# Altium PCB NS6202_V1.0.PcbDoc
Units mm, origin at the board's own origin, x right, y up, seen from the top; angles counter-clockwise.
Board outline 60 x 80 mm, 2 copper layers (Top, Bottom), stack 0.323 mm thick; 103 components, 109 nets, 414 pads, 207 vias.
Unrouted connection lines stored in the file: 1.
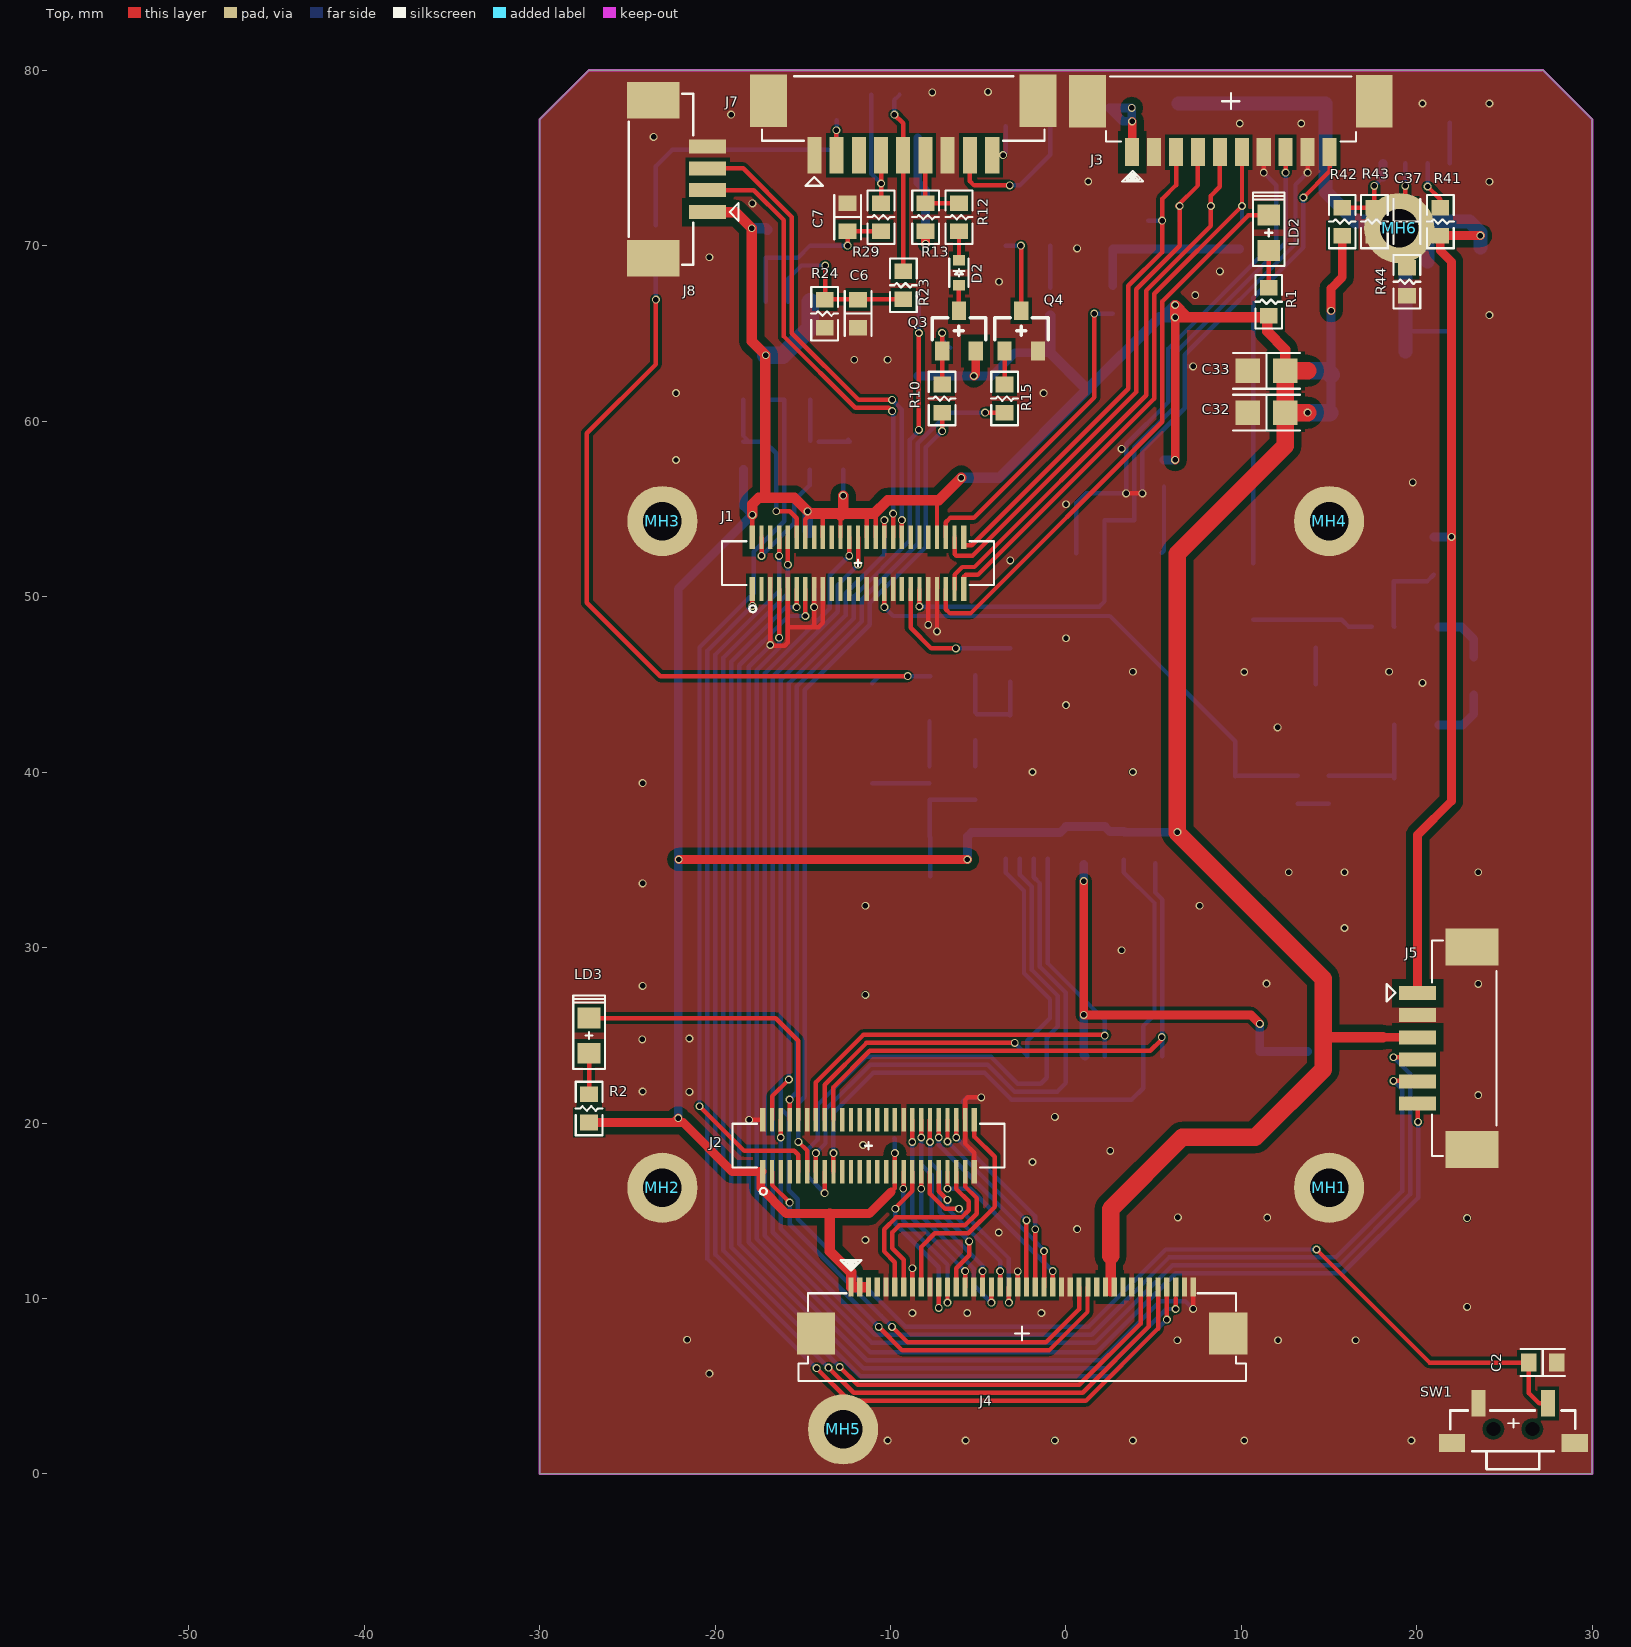
[diagram p0: Top view]
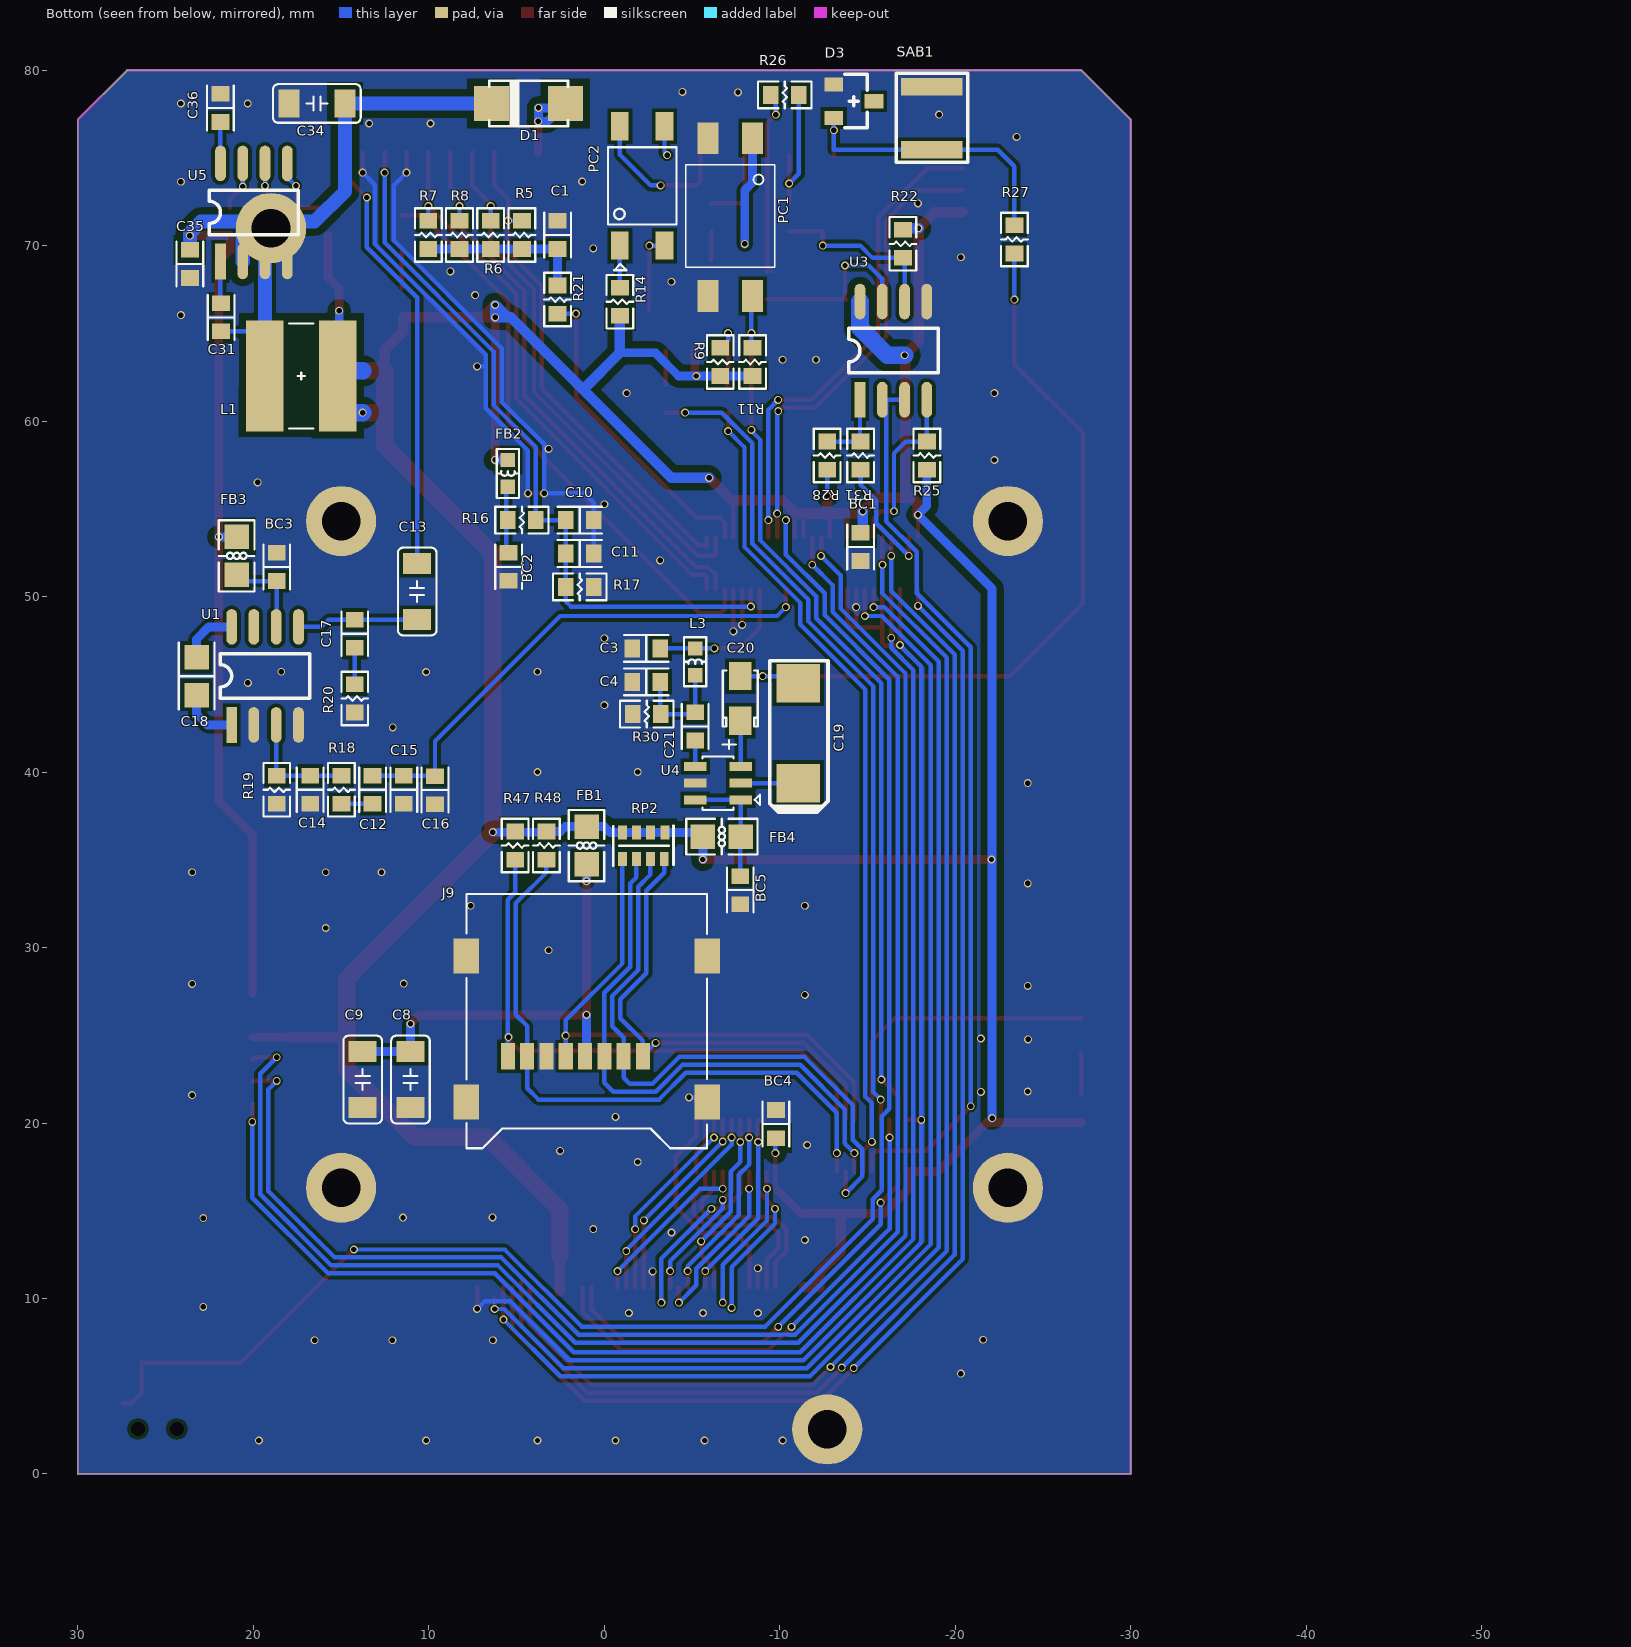
[diagram p1: Bottom view, seen from below]

## Layer stack, top to bottom
Solder Mask Top: solder mask 0.0102, Solder Resist, Dk 3.5
Top: signal copper 0.0343
Dielectric 1: core 0.254, FR-4, Dk 4.2
Bottom: signal copper 0.0343
Solder Mask Bottom: solder mask 0.0102, Solder Resist, Dk 3.5

## Board outline
-30,0 30,0 30,77.188 27.188,80 -27.188,80 -30,77.188

## Design rules (kind name [scope] priority, off if disabled: settings)
Clearance Clearance_4 [OnLayer('Keep-Out Layer') vs InNet('GND')] p1: gap=0.001
Clearance Clearance_3 [IsRegion vs (InNet('+12V') OR InNet('+12V_POE') OR InNet('+3.3V')OR InNet('+1.8V') or Innet('+5.0V')or Innet('N17301853'))] p2: gap=0.4
Clearance Clearance_2 [(InComponent('U1') OR InComponent('U4') OR InComponent('J2') OR InComponent('J7') OR InComponent('J8'))] p3: gap=0.2
Clearance Clearance_1 [IsVia] p4: gap=0.01
Clearance [All] p5: gap=0.2
ComponentClearance ComponentClearance_1 [InComponent('J6')] p1: gap=0 collisioncheckmode=3 verticalgap=0 showdistances=FALSE
ComponentClearance [All] p2: gap=0.01 collisioncheckmode=3 verticalgap=0.254 showdistances=FALSE
HoleSize [All] p1: absolutevalues=TRUE maxlimit=3.27 minlimit=0.025 maxpercent=80.000 minpercent=20.000
HoleToHoleClearance [All] p1: gap=0.01 allowstackedmicrovias=TRUE
MinimumSolderMaskSliver [All] p1: minsoldermaskwidth=0.01
PlaneConnect "Power Plane Connect Style - pads with no thermal_2" [(Name='U44-1') Or (Name='U45-1') Or (Name='U46-1') Or (Name='U47-1') Or (Name='U48-1') Or (Name='U49-1') Or (Name='U50-1') Or (Name='U51-1') Or (Name='U52-1') Or (Name='U55-1') Or (Name='U56-1') Or (Name='U57-1') Or (Name='U58-1') Or (Name='U6-1') Or (Name='U7-1') Or (Name='U8-1') Or (Name='U9-1')] p1: planeconnectstyle=NoConnect reliefexpansion=0.508 reliefentries=4 reliefconductorwidth=0.254 reliefairgap=0.254 // PAD - No Thermal Connect Rule
PlaneConnect "Power Plane Connect Style - pads with no thermal" [(Name='J10-0') Or (Name='J10-0/2') Or (Name='J11-0') Or (Name='J11-0/2') Or (Name='J13-6') Or (Name='J13-7') Or (Name='J2-13') Or (Name='J2-14') Or (Name='J4-15') Or (Name='J4-16') Or (Name='J6-5') Or (Name='J6-6') Or (Name='J6-9') Or (Name='J6-10') Or (Name='LS1-5') Or (Name='LS1-6') Or (Name='LS1-7') Or (Name='SW1-1') Or (Name='SW1-4') Or (Name='U10-1') Or (Name='U11-1') Or (Name='U12-1') Or (Name='U13-1') Or (Name='U14-1') Or (Name='U15-1') Or (Name='U16-1') Or (Name='U17-1') Or (Name='U18-1') Or (Name='U19-1') Or (Name='U20-1') Or (Name='U21-1') Or (Name='U22-1') Or (Name='U23-1') Or (Name='U24-1') Or (Name='U25-1') Or (Name='U26-1') Or (Name='U27-1') Or (Name='U28-1') Or (Name='U29-1') Or (Name='U30-1') Or (Name='U31-1') Or (Name='U32-1') Or (Name='U33-1') Or (Name='U34-1') Or (Name='U35-1') Or (Name='U36-1') Or (Name='U37-1') Or (Name='U38-1') Or (Name='U39-1') Or (Name='U40-1') Or (Name='U41-1') Or (Name='U42-1') Or (Name='U43-1')] p2: planeconnectstyle=NoConnect reliefexpansion=0.508 reliefentries=4 reliefconductorwidth=0.254 reliefairgap=0.254 // PAD - No Thermal Connect Rule
PlaneConnect [All] p3: planeconnectstyle=Relief reliefexpansion=0.508 reliefentries=4 reliefconductorwidth=0.254 reliefairgap=0.254
PolygonConnect [All] p1: connectstyle=Direct reliefconductorwidth=0.254 reliefentries=4 polygonreliefangle="90 Angle" airgapwidth=0.254
RoutingVias [All] p1: holewidth=0.308 width=0.45 viastyle="Through Hole" minholewidth=0.308 minwidth=0.45 maxholewidth=0.308 maxwidth=0.45
SilkToBoardRegionClearance [All] p1 off:
SilkToSilkClearance [All] p1: silktosilkclearance=0.01
SilkToSolderMaskClearance SilkToSolderMaskClearance_1 [OnLayer('Multi-Layer')] p1: minsilkscreentomaskgap=0 clearancetoexposedcopper=TRUE
SilkToSolderMaskClearance [IsPad] p2: minsilkscreentomaskgap=0.01 clearancetoexposedcopper=TRUE
SolderMaskExpansion [All] p1: expansion=0.102
Width Width_2 [InNet('VDD_3.3V')  or InNet('VDD_5.0V')] p1: maxlimit=3 minlimit=0.254 preferedwidth=2.4
Width Width_1 [InNet('+12V')] p2: maxlimit=1 minlimit=0.5 preferedwidth=0.5
Width [All] p3: maxlimit=1 minlimit=0.254 preferedwidth=0.254
21 further rules are at their usual default settings.

## Components (designator, comment, footprint, x,y, rotation, side; value= is the part's Value field where it differs from the comment)
BC1 "0.1uF" CS-1608#1 -14.605,52.832 r90 bottom
BC2 "0.1uF" CS-1608#1 5.461,51.697 r90 bottom
BC3 "0.1uF" CS-1608#1 18.669,51.689 r90 bottom
BC4 "0.1uF" CS-1608#1 -9.779,19.939 r270 bottom
BC5 "0.1uF" CS-1608#1 -7.747,33.274 r270 bottom
C1 "0.1uF" CS-1608#1 2.667,70.612 r90 bottom
C2 "1nF/NI" CS-1608#1 27.178,6.35 r0 top
C3 "100pF" CS-1608#2 -2.383,47.047 r180 bottom
C4 "270pF" CS-1608#1 -2.383,45.142 r0 bottom
C6 "2.2nF" CS-1608#1 -11.85,66.129 r90 top
C7 "2.2nF" CS-1608#1 -12.446,71.628 r270 top
C8 "22uF" C3216 11.049,22.479 r90 bottom
C9 "22uF" C3216 13.773,22.479 r90 bottom
C10 "220pF" CS-1608#1 1.397,54.364 r0 bottom
C11 "1nF" CS-1608#1 1.397,52.459 r0 bottom
C12 "2.2nF" CS-1608#1 13.208,38.989 r270 bottom
C13 "22uF" C3216 10.668,50.292 r270 bottom
C14 "2.2nF" CS-1608#1 16.764,38.989 r270 bottom
C15 "1nF" CS-1608#1 11.43,38.989 r90 bottom
C16 "220pF" CS-1608#1 9.652,38.973 r90 bottom
C17 "47pF" CS-1608#1 14.224,47.879 r90 bottom
C18 "10uF" CS-2012 23.241,45.466 r90 bottom
C19 "100uF-10V" C6032 -11.049,42.291 r90 bottom
C20 "22uF-16V" CTS-3216 -7.747,44.196 r90 bottom
C21 "0.1uF" CS-1608#1 -5.177,42.602 r90 bottom
C31 "10nF" CS-1608#1 21.844,65.913 r270 bottom
C32 "22uF-2012-6.3V" CS-2012 11.43,60.487 r180 top
C33 "22uF-2012-6.3V" CS-2012 11.43,62.865 r180 top
C34 "4.7uF-25V" C3216 16.383,78.105 r0 bottom
C35 "0.1uF" CS-1608#1 23.622,68.961 r270 bottom
C36 "0.1uF" CS-1608#1 21.878,77.851 r90 bottom
C37 "3.3nF" CS-1608#1 19.431,71.374 r270 top
D1 "RB051L-40" SOD-106 4.318,78.105 r180 bottom
D2 "1N4148" SOD-523 -6.096,68.453 r270 top
D3 "DZ23-C2V7" SOT-23 -14.224,78.232 r180 bottom
FB1 "60" LS-2012 1.016,35.814 r90 bottom
FB2 "60" LS-1608 5.499,57.023 r270 bottom
FB3 "60" LS-2012 20.955,52.324 r270 bottom
FB4 "60" LS-2012 -6.696,36.322 r180 bottom
J1 "AXK6F50547" AXK6F50547 -11.85,51.906 r0 top locked
J2 "AXK6F50547" AXK6F50547 -11.25,18.706 r0 top locked
J3 "12505WR-10" 12505WR-10P 9.398,78.232 r180 top
J4 "05005HS-40" 05003HR-H40E -2.5,8 r180 top locked
J5 "12505WS-06" 12505WS-6P 21.59,24.257 r270 top
J7 "12505WS-09" 12505WS-9P -9.271,76.708 r0 top
J8 "12505WS-4P//NI" 12505WS-4P -21.971,73.787 r270 top
J9 "112J-TXAR-R" CON_u-SD-Hinge 7.874,21.209 r180 bottom
L1 "CDRH5D18NP-100NC-10uH" CDRH5D18NP 17.272,62.573 r270 bottom
L3 "2.7uH" LS-1608 -5.177,46.285 r90 bottom
LD2 "LED" LED2012 11.557,70.739 r270 top
LD3 "LED" LED2012 -27.178,24.977 r270 top
MH1 "4.04pi" VA-2.2 15,16.306 r0 top locked
MH2 "4.04pi" VA-2.2 -23,16.306 r0 top locked
MH3 "4.04pi" VA-2.2 -23,54.306 r0 top locked
MH4 "4.04pi" VA-2.2 15,54.306 r0 top locked
MH5 "4.04pi" VA-2.2 -12.7,2.54 r0 top
MH6 "4.04pi" VA-2.2 19,71 r0 top
PC1 "PC817" PC817 -7.239,71.628 r270 bottom
PC2 "ASSR-4118" ASSR-4118 -2.159,73.406 r180 bottom
Q3 "MMBT3906" SOT-23 -6.096,65.151 r90 top
Q4 "MMBT6427" SOT-23 -2.54,65.151 r90 top
R1 "1K" RS-1608 11.557,66.802 r270 top
R2 "1K" RS-1608 -27.178,20.828 r270 top
R5 "51" RS-1608 4.699,70.612 r270 bottom
R6 "51" RS-1608 6.477,70.612 r270 bottom
R7 "51" RS-1608 10.033,70.612 r270 bottom
R8 "51" RS-1608 8.255,70.612 r270 bottom
R9 "10K" RS-1608 -6.604,63.373 r90 bottom
R10 "1K" RS-1608 -7.055,61.287 r90 top
R11 "10K" RS-1608 -8.447,63.373 r270 bottom
R12 "330" RS-1608 -6.096,71.628 r270 top
R13 "2.2K" RS-1608 -8.001,71.628 r270 top
R14 "330" RS-1608 -0.889,66.802 r270 bottom
R15 "1K" RS-1608 -3.499,61.287 r90 top
R16 "2.2K" RS-1608 4.699,54.364 r0 bottom
R17 "2.2K" RS-1608 1.397,50.554 r0 bottom
R18 "1K" RS-1608 14.986,38.989 r90 bottom
R19 "10K" RS-1608 18.669,38.989 r90 bottom
R20 "10" RS-1608 14.224,44.196 r90 bottom
R21 "0" RS-1608 2.667,66.929 r270 bottom
R22 "10K" RS-1608 -17.018,70.104 r90 bottom
R23 "47" RS-1608 -9.271,67.743 r90 top
R24 "10K" RS-1608 -13.75,66.129 r90 top
R25 "10K" RS-1608 -18.381,58.039 r270 bottom
R26 "120/NI" RS-1608 -10.287,78.594 r0 bottom
R27 "75" RS-1608 -23.368,70.358 r90 bottom
R28 "10K" RS-1608 -12.7,58.039 r270 bottom
R29 "47" RS-1608 -10.541,71.628 r90 top
R30 "75" RS-1608 -2.413,43.307 r180 bottom
R31 "100" RS-1608 -14.605,58.039 r90 bottom
R41 "100K" RS-1608 21.336,71.374 r90 top
R42 "26.1K_1%" RS-1608 15.748,71.374 r90 top
R43 "10K_1%" RS-1608 17.573,71.374 r90 top
R44 "2.2K" RS-1608 19.431,67.945 r90 top
R47 "1K" RS-1608 5.08,35.814 r90 bottom
R48 "1K" RS-1608 3.302,35.814 r90 bottom
RP2 "10K" RP-4 -2.286,35.814 r0 bottom
SAB1 "CSA70-301L" CSA70 -18.669,79.064 r0 bottom
SW1 "Tact-small//ITA-1102" SWOP-2 25.5,2.893 r180 top
U1 "LM386M-1" SOIC-8 19.304,45.466 r180 bottom
U3 "MAX3485ESA" SOIC-8 -16.51,64.008 r180 bottom
U4 "NJM2561F1" SOT-23-6P -6.477,39.37 r270 bottom
U5 "MP1482" SOIC-8 19.939,71.882 r180 bottom

## Footprints (in the part's own frame and the unit in brackets; to place one, negate y for a bottom-side part, rotate by r counter-clockwise, add the part's x,y. Pads: shape width x height; smd on the part's side, far side on the other; paste and mask are expansions set on the pad)
05003HR-H40E [mm]
  rect 0.3x1.1 smd: 1(9.75,-2.65) 2(9.25,-2.65) 3(8.75,-2.65) 4(8.25,-2.65) 5(7.75,-2.65) 6(7.25,-2.65) 7(6.75,-2.65) 8(6.25,-2.65) 9(5.75,-2.65) 10(5.25,-2.65) 11(4.75,-2.65) 12(4.25,-2.65) 13(3.75,-2.65) 14(3.25,-2.65) 15(2.75,-2.65) 16(2.25,-2.65) 17(1.75,-2.65) 18(1.25,-2.65) 19(0.75,-2.65) 20(0.25,-2.65) 21(-0.25,-2.65) 22(-0.75,-2.65) 23(-1.25,-2.65) 24(-1.75,-2.65) 25(-2.25,-2.65) 26(-2.75,-2.65) 27(-3.25,-2.65) 28(-3.75,-2.65) 29(-4.25,-2.65) 30(-4.75,-2.65) 31(-5.25,-2.65) 32(-5.75,-2.65) 33(-6.25,-2.65) 34(-6.75,-2.65) 35(-7.25,-2.65) 36(-7.75,-2.65) 37(-8.25,-2.65) 38(-8.75,-2.65) 39(-9.25,-2.65) 40(-9.75,-2.65)
  rect 2.184x2.413 smd: M1(11.744,-0.006) M2(-11.744,-0.006)
  silkscreen extent -12.75,-4.19 12.75,2.7
12505WR-10P [mm]
  rect 0.8x1.6 smd: 1(5.625,2.9) 2(4.375,2.9) 3(3.125,2.9) 4(1.875,2.9) 5(0.625,2.9) 6(-0.625,2.9) 7(-1.875,2.9) 8(-3.125,2.9) 9(-4.375,2.9) 10(-5.625,2.9)
  rect 2.1x3 smd: 11(-8.175,0) 12(8.175,0)
  silkscreen extent -7.12,-1.4 7.12,4.56
12505WS-4P [mm]
  rect 0.8x2.1 smd: 1(1.875,1.55) 2(0.625,1.55) 3(-0.625,1.55) 4(-1.875,1.55)
  rect 2.1x3 smd: 5(-4.5,-1.55) 6(4.5,-1.55)
  silkscreen extent -4.87,-2.95 4.87,3.3
12505WS-6P [mm]
  rect 0.8x2.1 smd: 1(-3.145,-1.55) 2(-1.895,-1.55) 3(-0.625,-1.55) 4(0.625,-1.55) 5(1.895,-1.55) 6(3.145,-1.55)
  rect 2.1x3 smd: M1(-5.77,1.55) M2(5.77,1.55)
  silkscreen extent -6.14,-3.31 6.14,2.95
12505WS-9P [mm]
  rect 0.8x2.1 smd: 1(-5.07,-1.55) 2(-3.8,-1.55) 3(-2.53,-1.55) 4(-1.26,-1.55) 5(-0.01,-1.55) 6(1.26,-1.55) 7(2.53,-1.55) 8(3.8,-1.55) 9(5.07,-1.55)
  rect 2.1x3 smd: 10(7.675,1.55) 11(-7.675,1.55)
  silkscreen extent -8.05,-3.29 8.05,2.95
ASSR-4118 [mm]
  rect 1x1.6 smd: 1(-1.27,-3.4) 2(1.27,-3.4) 3(1.27,3.4) 4(-1.27,3.4)
  silkscreen extent -1.95,-4.8 1.95,2.2
AXK6F50547 [mm]
  rect 0.3x1.35 smd: 1(-6.025,-1.475) 2(-6.025,1.475) 49(6.025,-1.475) 50(6.025,1.475)
  rect 0.25x1.35 smd: 3(-5.5,-1.475) 4(-5.5,1.475) 5(-5,-1.475) 6(-5,1.475) 7(-4.5,-1.475) 8(-4.5,1.475) 9(-4,-1.475) 10(-4,1.475) 11(-3.5,-1.475) 12(-3.5,1.475) 13(-3,-1.475) 14(-3,1.475) 15(-2.5,-1.475) 16(-2.5,1.475) 17(-2,-1.475) 18(-2,1.475) 19(-1.5,-1.475) 20(-1.5,1.475) 21(-1,-1.475) 22(-1,1.475) 23(-0.5,-1.475) 24(-0.5,1.475) 25(0,-1.475) 26(0,1.475) 27(0.5,-1.475) 28(0.5,1.475) 29(1,-1.475) 30(1,1.475) 31(1.5,-1.475) 32(1.5,1.475) 33(2,-1.475) 34(2,1.475) 35(2.5,-1.475) 36(2.5,1.475) 37(3,-1.475) 38(3,1.475) 39(3.5,-1.475) 40(3.5,1.475) 41(4,-1.475) 42(4,1.475) 43(4.5,-1.475) 44(4.5,1.475) 45(5,-1.475) 46(5,1.475) 47(5.5,-1.475) 48(5.5,1.475)
  silkscreen extent -7.75,-2.8 7.75,1.25
C3216 [mm]
  rect 1.2x1.6 smd: 1(-1.6,0) 2(1.6,0)
  silkscreen extent -2.5,-1.1 2.5,1.1
C6032 [mm]
  rect 2.2x2.5 smd: 1(-2.921,0) 2(2.779,0)
  silkscreen extent -4.56,-1.7 4.06,1.63
CDRH5D18NP [mm]
  rect 6.3x2.15 smd: 1(0,-2.075) 2(0,2.075)
  silkscreen extent -3,-0.7 3,0.7
CON_u-SD-Hinge [mm]
  rect 0.8x1.5 smd: 1(10.075,2.6) 2(8.975,2.6) 3(7.875,2.6) 4(6.775,2.6) 5(5.675,2.6) 6(4.575,2.6) 7(3.475,2.6) 8(2.375,2.6)
  rect 1.45x2 smd: 9(13.75,8.3) 10(13.75,0) 11(0,8.3) 12(0,0)
  silkscreen extent 0.03,-2.65 13.72,11.85
CS-1608#1 [mil]
  rect 35x40 smd: 1(-31.5,0) 2(31.5,0)
  silkscreen extent -50,-30 50,30
CS-1608#2 [mil]
  rect 35x40 smd: 1(31.5,0) 2(-31.5,0)
  silkscreen extent -50,-30 50,30
CS-2012 [mil]
  rect 55x55 smd: 1(-42.5,0) 2(42.5,0)
  silkscreen extent -75,-40 75,40
CSA70 [mm]
  rect 3.5x1 smd: 1(0,0) 2(0,3.6)
  silkscreen extent -2.03,-0.76 2.03,4.32
CTS-3216 [mil]
  rect 63x51 smd: 1(-50,0) 2(50,0)
  silkscreen extent -113,-39 63,40
LED2012 [mil]
  rect 47x51 smd: 1(39.37,0) 2(-39.37,0)
  silkscreen extent -91,-35 75,35
LS-1608 [mil]
  rect 32x32 smd: 1(-30,0) 2(30,0)
  silkscreen extent -55,-25 55,25
LS-2012 [mil]
  rect 55x55 smd: 1(-42.5,0) 2(42.5,0)
  silkscreen extent -80,-40 80,40
PC817 [mm]
  rect 1.8x1.2 smd: 1(-4.506,1.208) 2(-4.506,-1.332) 3(4.494,-1.332) 4(4.494,1.208)
  silkscreen extent -2.98,-2.6 2.86,2.48
RP-4 [mm]
  rect 0.5x0.8 smd: 1(-1.133,0.765) 2(-1.178,-0.738) 3(-0.343,0.762) 4(-0.343,-0.738) 5(0.457,0.762) 6(0.457,-0.738) 7(1.257,0.762) 8(1.257,-0.738)
  silkscreen extent -1.66,-1.13 1.78,1.14
RS-1608 [mil]
  rect 35x40 smd: 1(-31.5,0) 2(31.5,0)
  silkscreen extent -60,-30 60,30
SOD-106 [mm]
  rect 2x2 smd: 1(2.1,0) 2(-2.1,0)
  silkscreen extent -2.25,-1.3 2.25,1.3
SOD-523 [mm]
  rect 0.6x0.7 smd: 1(0.71,0) 2(-0.71,0)
  silkscreen extent -0.8,-0.55 0.8,0.55
SOIC-8 [mil]
  rect 24x80 smd: 1(-76.34,-109.45)
  oval 24x80 smd: 2(-26.34,-109.45) 3(23.66,-109.45) 4(73.66,-109.45) 5(73.66,110.55) 6(23.66,110.55) 7(-26.34,110.55) 8(-76.34,110.55)
  silkscreen extent -101,-49 99,51
SOT-23 [mil]
  rect 42x32 smd: 1(-45.45,37.75) 2(-45.45,-37.35) 3(44.85,0.2)
  silkscreen extent -20,-60 30,60
SOT-23-6P [mm]
  rect 0.508x1.27 smd: 1(0.95,1.3) 2(0,1.3) 3(-0.95,1.3) 4(-0.95,-1.3) 5(0,-1.3) 6(0.95,-1.3)
  silkscreen extent -1.52,-0.89 1.52,2.4
SWOP-2 [mm]
  rect 0.8x1.5 smd: 1(-1.98,-1.13) 2(1.99,-1.13)
  rect 1.5x1 smd: 3(-3.5,1.13) 4(3.5,1.13)
  round 0.025 hole 0.8 unplated: 5(-1.08,0.33) 6(1.14,0.33)
  silkscreen extent -3.53,-0.72 3.59,2.62
VA-2.2 [mm]
  rrect100% 4x4 hole 2.2: 1(0,0)

## Via types
v1: diameter 0.45, hole 0.308, Top to Bottom, 207 vias

## Nets (pads, with @x,y where several pads share a name; then routed paths per layer and width w, separated by ;. In a path a pad name is that pad's centre, name@x,y a point inside that pad or via, vN(x,y) a via of type N, cw(c..) or ccw(c..) an arc to the next point about the centre after c; other vN are vias at no path point)
+3.3V: BC1.2 BC4.2 C32.1 C33.1 FB1.2 FB2.1 FB4.1 J1.2 J1.14 J1.18 J1.22 J1.28 J1.30 J1.44 J2.1 J2.31 J4.1 J4.2 J4.3 J4.30 J4.31 J5.3 J8.1 L1.2 Q3.2 R1.2 R2.2 R9.1 R11.2 R14.2 R22.2 R25.2 R28.2 R42.1 R47.2 R48.2 RP2.2 RP2.4 RP2.6 RP2.8 U3.8 | length 288.8
  Top w0.254: J1.2 v1(-17.875,54.662) ; J1.14 -14.85,54.412 -14.525,54.737 ; J1.18 -13.85,54.603 ; J1.22 -12.85,54.587 -12.827,54.61 ; J1.28 -11.35,54.657 ; J1.30 -10.85,54.864 ; -9.96,16.085 -9.75,16.295 J2.31 v1(-9.75,18.288) ; J1.44 -7.35,55.499
  Top w0.5: R2.2 -22.352,20.028 ; v1(-22.098,20.282) -22.352,20.028 ; v1(-22.065,35.019) v1(-5.617,35.019) ; J2.1@-17.327,17.231 J2.1@-17.399,17.231 ; -9.96,16.085 -11.209,14.836 -15.933,14.836 -17.399,16.302 J2.1@-17.399,17.231 ; v1(-5.245,62.573) -5.147,62.671 Q3.2 ; v1(6.223,57.793) v1(6.223,65.913) ; v1(15.113,66.294) 15.113,67.564 15.748,68.199 R42.1 ; 18.044,24.882 J5.3 ; -22.352,20.028 -21.806,20.028 -19.009,17.231 J2.1@-17.399,17.231
  Top w0.6: J8.1 -18.826,71.912 v1(-17.907,70.993) -17.907,64.55 -17.145,63.788 -17.145,55.626 ; v1(-17.875,54.662) -17.875,55.27 -17.519,55.626 -17.145,55.626 ; v1(-14.723,54.855) -15.494,55.626 -17.145,55.626 ; -14.525,54.737 -14.225,54.737 ; -14.098,54.737 -10.922,54.737 -10.16,55.499 -7.239,55.499 v1(-5.969,56.769) ; -13.462,14.836 -13.462,12.7 -12.25,11.488 J4.1 J4.2 J4.3@-11.4,10.65 ; -12.827,54.61 -12.7,54.737 v1(-12.7,55.753) ; 2.54,10.414 2.54,12.446 ; 6.858,65.984 v1(6.223,66.619) v1(6.223,65.913) 9.017,65.913 11.468,65.913 11.468,65.113 12.509,64.071 C33.1 ; 14.668,25.019 14.805,24.882 18.044,24.882
  Top w1: 2.54,12.446 2.54,15.086 6.631,19.177 10.795,19.177 14.668,23.05 14.668,25.019 14.668,28.225 6.35,36.543 6.35,52.451 12.509,58.61 12.509,59.468 C32.1 ; v1(13.773,60.487) C32.1 ; 13.773,62.865 C33.1 C32.1
  Bottom w0.254: v1(-12.7,55.753) R28.2 ; BC4.2 -9.75,19.11 v1(-9.75,18.288)
  Bottom w0.5: v1(-22.098,20.282) -22.098,50.439 v1(-17.875,54.662) -18.381,55.168 R25.2 ; R11.2 R9.1 v1(-5.245,62.573) -4.229,62.573 -2.909,63.893 -0.889,63.893 ; v1(-5.617,35.019) FB4.1 -5.387,36.552 RP2.8 -0.342,36.552 0,36.893 FB1.2 2.222,36.893 2.502,36.614 R48.2 3.34,36.576 v1(6.35,36.576) ; FB2.1@5.588,57.793 v1(6.223,57.793) ; L1.2@15.021,60.487 15.113,60.579 L1.2@15.113,62.657 ; v1(15.113,66.294) L1.2@15.113,62.657 ; L1.2 L1.2@15.113,62.657
  Bottom w0.6: v1(-17.907,70.993) -17.107,70.993 R22.2 ; v1(-14.723,54.855) -14.723,53.75 BC1.2 ; v1(-5.969,56.769) -3.81,56.769 1.143,61.722 ; R14.2 -0.889,63.893 1.143,61.861 1.143,61.722 ; 5.517,65.913 v1(6.223,66.619) v1(6.223,65.913) 5.334,65.913 1.143,61.722
  Bottom w1: v1(-17.111,63.754) -16.129,63.754 -14.571,65.312 U3.8 ; v1(13.773,60.487) L1.2@15.021,60.487 ; 13.773,62.865 14.905,62.865 L1.2@15.113,62.657
+12V: C34.1 C35.1 D1.2 FB3.1 J5.1 R41.1 U5.2 | length 73.9
  Top w0.5: J5.1 20.04,36.423 21.971,38.354 v1(21.971,53.403) 21.971,69.088 21.336,69.723 R41.1 v1(23.622,70.574)
  Bottom w0.5: FB3.1 v1(21.971,53.403)
  Bottom w0.8: D1.2 C34.1 14.783,73.101 16.51,71.374 20.701,71.374 ; U5.2 20.608,71.281 20.701,71.374 ; C35.1@23.622,69.902 v1(23.622,70.574) 23.622,70.739 22.987,71.374 20.701,71.374
AIN: C10.2 C11.2 J1.39 J3.8 R16.1 R17.2 | length 42.5
  Top w0.254: v1(-8.35,49.435) J1.39 ; v1(12.523,74.168) J3.8
  Bottom w0.254: v1(-8.35,49.435) 1.905,49.435 2.197,49.727 R17.2 C11.2 C10.2 R16.1 3.899,58.509 6.312,60.922 6.312,63.97 12.523,70.181 v1(12.523,74.168)
AOUT: C12.1 C15.2 C16.2 J1.31 | length 29.7
  Top w0.254: v1(-10.35,49.403) J1.31
  Bottom w0.254: v1(-10.35,49.403) -9.842,48.895 2.508,48.895 9.652,41.751 C16.2 ; C16.2@9.668,39.789 C15.2 C12.1
AOUT_CON: C13.1 J3.10 | length 25.2
  Top w0.254: v1(13.535,72.747) 15.023,74.235 J3.10
  Bottom w0.254: C13.1 10.668,67.042 13.535,69.909 v1(13.535,72.747)
DAC_OUT: C3.1 J1.37 L3.2 | length 8.4
  Top w0.254: J1.37 -8.85,48.22 -7.677,47.047 v1(-6.273,47.047)
  Bottom w0.254: v1(-6.273,47.047) L3.2 C3.1
DI_CON0: J7.6 R12.1 R13.1 | length 4.6
  Top w0.254: J7.6 -8.011,72.438 R13.1 R12.1
DI_D0: J2.4 PC1.4 R11.1 | length 51.3
  Top w0.254: J2.4 -16.75,21.519 v1(-15.79,22.479) ; v1(-8.382,59.501) v1(-8.382,65.024)
  Bottom w0.254: v1(-15.79,22.479) -15.79,45.07 -12.084,48.776 -12.084,50.012 -8.896,53.2 -8.896,58.929 -8.382,59.443 v1(-8.382,59.501) ; PC1.4 -8.382,67.069 v1(-8.382,65.024) R11.1@-8.382,64.173
DI_TYPE: J2.11 R10.1 | length 46.9
  Top w0.254: v1(-15.25,18.923) -15.243,18.923 -14.75,18.43 J2.11 ; v1(-7.055,59.436) R10.1
  Bottom w0.254: v1(-15.25,18.923) -15.25,21.123 -14.882,21.491 -14.882,44.694 -11.176,48.4 -11.176,49.636 -7.988,52.824 -7.988,58.503 v1(-7.055,59.436)
DO_COM_CON: J7.9 PC2.3 | length 1.7
  Bottom w0.254: v1(-3.582,75.158) -3.429,75.311 PC2.3
DO_CON0: J7.8 PC2.4 | length 8.5
  Top w0.254: J7.8 -5.471,73.67 -5.237,73.436 v1(-3.205,73.436)
  Bottom w0.254: v1(-3.205,73.436) -2.637,73.436 -0.889,75.184 PC2.4
DO_D0: J2.8 R15.1 | length 47.3
  Top w0.254: J2.8 v1(-15.75,21.336) ; v1(-4.607,60.487) R15.1
  Bottom w0.254: v1(-15.75,21.336) -15.336,21.75 -15.336,44.882 -11.63,48.588 -11.63,49.824 -8.442,53.012 -8.442,58.741 -6.696,60.487 v1(-4.607,60.487)
EPHY_RX+: J1.50 J3.3 R5.1 | length 29.1
  Top w0.254: J1.50 -5.825,52.832 -5.732,52.925 -5.369,52.925 3.556,61.849 3.556,67.712 5.48,69.636 v1(5.48,71.431) 5.48,72.663 6.273,73.456 J3.3
  Bottom w0.254: R5.1 5.461,71.412 v1(5.48,71.431)
EPHY_RX-: J1.48 J3.4 R6.1 | length 31.3
  Top w0.254: J1.48 -6.35,52.424 -6.25,52.324 -5.327,52.324 4.01,61.661 4.01,67.524 6.477,69.991 v1(6.477,72.263) ; v1@6.35,72.263 7.523,73.436 J3.4
  Bottom w0.254: R6.1 v1(6.477,72.263)
EPHY_TRCT: J1.46 R21.2 | length 18.1
  Top w0.254: J1.46 -6.85,54.237 -6.604,54.483 -5.258,54.483 1.613,61.354 v1(1.613,66.129)
  Bottom w0.254: v1(1.613,66.129) R21.2
EPHY_TX+: J1.49 J3.6 R7.1 | length 32.7
  Top w0.254: J1.49 -5.825,51.125 -5.715,51.235 -5.026,51.235 5.026,61.287 5.026,67.256 v1(10.033,72.263) 10.033,75.322 J3.6
  Bottom w0.254: R7.1 v1(10.033,72.263)
EPHY_TX-: J1.47 J3.5 R8.1 | length 32.4
  Top w0.254: J1.47 -6.35,51.242 -5.903,51.689 -5.214,51.689 4.572,61.475 4.572,67.444 8.255,71.127 v1(8.255,72.263) 8.255,72.834 8.773,73.352 J3.5
  Bottom w0.254: R8.1 v1(8.255,72.263)
FD_SW: C2.1 J1.32 SW1.1 | length 95.4
  Top w0.254: J1.32 v1(-10.35,54.364) ; v1(14.278,12.792) 20.72,6.35 C2.1 26.378,4.61 26.965,4.023 SW1.1
  Bottom w0.254: v1(-10.35,54.364) -10.35,52.388 -12.554,50.184 -12.554,48.948 -16.244,45.258 -16.244,20.816 -15.802,20.374 -15.802,16.163 -15.294,15.655 -15.294,14.532 -9.163,8.401 1.294,8.401 5.685,12.792 v1(14.278,12.792)
FOCUS_CTRL_CLK: J2.23
FOCUS_CTRL_DIR: J2.26
FOCUS_CTRL_EN: J2.29
FOCUS_CTRL_NFAULT: J2.21
FOCUS_CTRL_NSLEEP: J2.24
GND: BC1.1 BC2.1 BC3.2 BC4.1 BC5.2 C1.2 C2.2 C3.2 C4.2 C6.1 C7.1 C8.1 C9.1 C10.1 C11.1 C14.2 C15.1 C16.1 C32.2 C33.2 C34.2 C35.2 C36.2 D3.1 J1.5 J1.9 J1.15 J1.16 J1.17 J1.27 J1.29 J1.33 J1.41 J1.43 J2.2 J2.12 J2.34 J2.48 J2.49 J3.2 J3.7 J3.9 J3.11 J3.12 J4.5 J4.8 J4.10 J4.15 J4.20 J4.25 J4.26 J4.33 J4.39 J4.40 J4.M1 J4.M2 J5.2 J5.M1 J5.M2 J7.1 J7.7 J7.10 J7.11 J8.4 J8.5 J8.6 J9.6 J9.9 J9.10 J9.11 J9.12 MH1.1 MH2.1 MH3.1 MH4.1 MH5.1 MH6.1 PC1.2 PC1.3 Q4.2 R17.1 R19.1 R20.1 R24.1 R30.1 R43.1 R44.1 SAB1.1 SW1.2 SW1.3 SW1.4 U1.2 U1.4 U3.5 U4.5 U5.4 | length 146.6
  Top w0.254: v1(-18.06,20.181) J2.2 ; v1(-16.85,47.244) J1.5 ; v1@-16.81,47.204 -16.028,47.204 -15.85,47.382 -15.85,48.26 ; J1.9 -15.85,48.26 ; J1.15 -14.35,48.388 -14.478,48.26 ; J1.17 -13.85,48.508 -14.098,48.26 -14.478,48.26 ; J4.8 v1(-8.75,11.721) ; v1(-7.85,48.388) J1.41 ; v1(-7.35,48.022) J1.43 ; J2.49 -5.225,18.306 -5.75,18.831 J2.48 -5.75,21.312 -5.599,21.463 v1(-4.826,21.463) ; J4.20 v1(-2.75,11.549) ; v1(3.429,55.888) v1(4.353,55.888) ; v1(7.25,9.409) J4.40 ; v1(11.273,74.168) J3.7 ; v1(13.773,74.168) J3.9 ; -15.85,48.26 -14.478,48.26
  Bottom w0.254: v1@-16.838,47.232 -18.072,45.998 -18.072,13.204 -11.345,6.477 1.997,6.477 5.374,9.854 6.805,9.854 v1(7.25,9.409) ; J9.10 -5.622,21.463 v1(-4.826,21.463) ; C11.1 0.597,55.342 1.143,55.888 v1(3.429,55.888) 3.429,58.681 5.842,61.094 5.842,64.142 11.992,70.292 11.992,73.449 v1(11.273,74.168) ; v1(4.353,55.888) 4.353,58.321 6.766,60.734 6.766,63.119 ; v1(7.25,63.119) 6.766,63.119 ; v1(13.773,74.168) 13.081,73.476 13.081,70.097 6.766,63.782 6.766,63.119
  other v1: -10.16,1.905 -5.715,1.905 3.81,1.905 10.16,1.905 19.685,1.905 -20.32,5.715 6.35,7.62 12.083,7.62 16.51,7.62 -21.59,7.645 -8.75,9.173 -5.625,9.173 -1.397,9.173 22.86,9.524 -11.43,13.335 -3.828,13.761 0.635,13.95 6.377,14.618 11.473,14.605 -1.905,17.78 2.522,18.415 -11.557,18.748 -0.635,20.352 23.495,21.591 -21.463,21.771 -24.13,21.796 -24.151,24.765 -21.463,24.816 -24.13,27.813 23.495,27.932 11.43,27.94 3.175,29.845 15.875,31.115 -11.43,32.385 7.62,32.385 -24.13,33.655 12.7,34.29 15.875,34.29 23.495,34.29 -24.13,39.37 -1.905,40.005 12.062,42.545 0,43.815 20.32,45.085 10.16,45.702 3.81,45.72 18.415,45.72 0,47.625 -14.351,49.403 -3.175,52.07 0,55.265 19.764,56.515 -22.225,57.785 3.175,58.42 -22.225,61.595 -1.27,61.595 -12.065,63.5 -10.162,63.5 24.13,66.04 7.366,67.183 -3.818,67.945 8.773,68.538 -20.32,69.342 0.635,69.85 -17.875,72.411 24.13,73.642 1.27,73.66 -23.496,76.2 9.906,76.962 13.408,76.962 -19.081,77.47 20.323,78.105 24.13,78.105 -7.62,78.74 -4.445,78.77
I2C_SCL: J1.24 J5.4 | length 94.2
  Top w0.254: v1(-12.35,52.324) J1.24 ; v1(18.669,23.749) 19.923,23.749 J5.4
  Bottom w0.254: v1(-12.35,52.324) -13.462,51.212 -13.462,49.324 -17.164,45.622 -17.164,13.58 -11.058,7.474 -10.292,7.474 -10.29,7.476 -10.289,7.474 1.651,7.474 6.061,11.884 15.56,11.884 19.612,15.936 19.612,22.806 v1(18.669,23.749)
I2C_SDA: J1.26 J5.5 | length 91.2
  Top w0.254: v1(-11.85,51.816) J1.26 ; v1(18.669,22.401) 20.001,22.401 J5.5
  Bottom w0.254: v1(-11.85,51.816) -13.008,50.658 -13.008,49.136 -16.71,45.434 -16.71,13.768 -10.87,7.928 -10.48,7.928 -10.461,7.947 -10.12,7.947 -10.101,7.928 1.463,7.928 5.873,12.338 15.372,12.338 19.158,16.124 19.158,21.912 v1(18.669,22.401)
IR_PWM: J1.7 J5.6 | length 87
  Top w0.254: v1(-16.35,47.658) J1.7 ; J5.6 20.04,20.092 v1(20.066,20.066)
  Bottom w0.254: v1(-16.35,47.658) -16.35,47.078 -17.618,45.81 -17.618,13.392 -11.157,6.931 1.75,6.931 6.249,11.43 15.748,11.43 20.066,15.748 v1(20.066,20.066)
LED_GN: J2.10 LD3.2 | length 17
  Top w0.254: LD3.2 -16.539,25.977 -15.25,24.688 J2.10
LED_MLINK: J1.45 LD2.2 | length 33.1
  Top w0.254: J1.45 -6.85,49.288 -6.604,49.042 -5.441,49.042 5.48,59.963 5.48,66.821 10.398,71.739 LD2.2
LENC_IRIS_PWM1: J2.30
LENC_IRIS_PWM2: J2.27
N15229178: Q3.1 R9.2 R10.2 | length 4
  Top w0.254: v1(-7.055,65.024) Q3.1 -7.055,62.157 R10.2@-6.985,62.087
  Bottom w0.254: v1(-7.055,65.024) -7.055,64.624 R9.2
N15229370: D2.1 Q3.3 | length 1.5
  Top w0.254: Q3.3 -6.101,67.738 D2.1
N15229490: PC1.1 R13.2 | length 6.9
  Top w0.5: v1(-8.001,70.104) R13.2
  Bottom w0.5: PC1.1 -8.447,73.598 -8.001,73.152 v1(-8.001,70.104)
N15229728: PC2.1 R14.1 | length 2.4
  Bottom w0.254: R14.1 PC2.1
N16657531: D2.2 R12.2 | length 1.7
  Top w0.254: D2.2 R12.2
N16698570: PC2.2 Q4.3 | length 4.6
  Top w0.254: v1(-2.569,70.006) -2.545,69.982 Q4.3
  Bottom w0.254: PC2.2 v1(-2.569,70.006)
N17016752: R41.2 U5.7 | length 2.8
  Top w0.254: v1(20.608,73.372) 21.336,72.644 R41.2
  Bottom w0.254: v1(20.608,73.372) U5.7
N17016775: C36.1 U5.8 | length 2.3
  Bottom w0.254: U5.8 C36.1@21.878,77.017
N17016804: C37.1 U5.6 | length 2.7
  Top w0.254: v1(19.338,73.406) 19.338,72.267 C37.1
  Bottom w0.254: v1(19.338,73.406) v1@19.338,73.529 ; U5.6 v1@19.338,73.529 ; v1@19.431,73.436 v1@19.338,73.529
N17016806: C37.2 R44.2 | length 1.8
  Top w0.254: R44.2 C37.2
N17016820: R42.2 R43.2 U5.5 | length 4.5
  Top w0.254: R42.2 R43.2 v1(17.573,73.406)
  Bottom w0.254: v1(17.573,73.406) U5.5@18.068,73.901
  Bottom w0.5: U5.5@18.068,73.901 U5.5
N17016832: C31.2 L1.1 U5.3 | length 7.6
  Bottom w0.254: L1.1@19.376,65.113 C31.2
  Bottom w0.8: U5.3 19.338,63.979 L1.1@19.347,63.97
N17083443: BC2.2 FB2.2 R16.2 | length 3.8
  Bottom w0.254: BC2.2 5.588,52.624 FB2.2@5.588,56.269
N17084260: C14.1 R18.2 R19.2 U1.3 | length 6.7
  Bottom w0.254: R18.2 R19.2 ; R19.2@18.703,39.658 U1.3
N17084264: C12.2 R18.1 | length 1.8
  Bottom w0.254: C12.2 R18.1
N17084571: C13.2 C17.2 U1.5 | length 6.9
  Bottom w0.254: C13.2 14.211,48.692 C17.2 15.724,48.679 16.129,48.274 U1.5
N17084587: BC3.1 FB3.2 U1.6 | length 5.1
  Bottom w0.254: U1.6 18.669,48.308 BC3.1 20.599,50.889 FB3.2
N17084593: C17.1 R20.2 | length 2.1
  Bottom w0.254: R20.2 C17.1
N17084622: C18.2 U1.8 | length 3.3
  Bottom w0.5: U1.8 22.538,48.274 23.241,47.571 C18.2
N17084632: C18.1 U1.1 | length 3.3
  Bottom w0.5: U1.1 22.62,42.686 23.241,43.307 C18.1
N17300121: LD3.1 R2.1 | length 2.3
  Top w0.254: R2.1 LD3.1
N17300123: LD2.1 R1.1 | length 2.1
  Top w0.254: R1.1 LD2.1
N17301853: D1.1 J3.1 | length 5.4
  Top w0.5: J3.1 v1(3.773,77.089)
  Bottom w0.5: v1@3.75,77.112 v1(3.75,77.851) 2.472,77.851 3.234,77.089 v1(3.773,77.089)
N17326149: C8.2 C9.2 FB1.1 J9.4 | length 25.5
  Top w0.5: v1(1.016,33.782) v1(1.016,26.162) 10.541,26.162 v1(11.049,25.654)
  Bottom w0.5: v1(1.016,26.162) 1.016,23.892 J9.4 ; v1(1.016,33.782) FB1.1 ; v1(11.049,25.654) C8.2 C9.2
N17332699: C1.1 R5.2 R6.2 R7.2 R8.2 R21.1 | length 9.3
  Bottom w0.5: R21.1 C1.1 R7.2@9.906,69.812
N17333419: C4.1 C21.2 L3.1 R30.2 | length 6
  Bottom w0.254: L3.1 C21.2 -5.082,43.307 R30.2 -3.183,43.337 C4.1 ; R30.2@-3.213,43.237 R30.2@-3.183,43.237
N17333490: BC5.1 FB4.2 U4.1 U4.6 | length 7
  Bottom w0.254: BC5.1 -7.747,36.293 FB4.2 U4.1 U4.6
N17333506: C19.1 U4.2 | length 3.3
  Bottom w0.254: C19.1 U4.2
N17333508: C19.2 C20.2 R27.1 | length 45
  Top w0.254: v1(-23.368,66.929) -23.368,63.246 -27.305,59.309 -27.305,49.651 -23.12,45.466 v1(-9.017,45.466)
  Bottom w0.254: v1(-23.368,66.929) R27.1 ; C19.2 -10.653,45.466 v1(-9.017,45.466) C20.2
N17333510: C20.1 U4.3 | length 2.6
  Bottom w0.254: U4.3 C20.1@-7.777,42.896
N17333592: C21.1 U4.4 | length 1.5
  Bottom w0.254: U4.4 C21.1
N17334107: C6.2 R23.1 R24.2 U3.7 | length 10.1
  Top w0.254: R24.2 -13.736,66.943 R23.1 ; v1(-13.716,68.872) -13.716,67.094 R24.2@-13.65,67.029
  Bottom w0.254: U3.7 -15.841,68.106 -15.075,68.872 v1(-13.716,68.872)
N17334109: R28.1 R31.2 U3.1 | length 4.3
  Bottom w0.254: R31.2@-14.571,58.873 U3.1 ; -14.097,58.839 -12.319,58.839 R28.1@-12.419,58.939
N17334111: C7.2 R22.1 R29.1 U3.6 | length 10.1
  Top w0.254: v1(-12.446,70.006) C7.2 R29.1
  Bottom w0.254: U3.6 R22.1@-17.111,69.304 ; R22.1 -15.285,69.304 -14.583,70.006 v1(-12.446,70.006)
N173250840: C31.1 U5.1 | length 2.4
  Bottom w0.254: C31.1 21.878,66.747 U5.1
N173253942: Q4.1 R15.2 | length 1.9
  Top w0.254: R15.2 Q4.1
RTS_485: J2.9 U3.2 U3.3 | length 51.1
  Top w0.254: v1(-20.885,20.955) -18.345,18.415 -15.477,18.415 -15.25,18.188 J2.9
  Bottom w0.254: v1(-20.885,20.955) -20.885,47.108 -17.804,50.189 -17.804,52.554 -16.055,54.303 -16.055,61.228 U3.3
SD0_CLK: J2.14 J9.5 RP2.7 | length 32.4
  Top w0.254: J2.14 -14.25,22.326 -11.557,25.019 2.25,25.019 v1(2.208,24.977)
  Bottom w0.254: RP2.7 -1.029,29.096 2.199,25.868 J9.5
SD0_CMD: J2.13 J9.3 RP2.5 | length 32.9
  Top w0.254: J2.13 v1(-14.25,18.288)
  Bottom w0.254: v1(-14.25,18.288) -13.704,18.834 -13.704,20.769 -11.159,23.314 -4.454,23.314 -2.93,21.79 -0.508,21.79 -0.001,22.297 J9.3 -0.001,27.426 -1.483,28.908 -1.483,33.655 -1.829,34.001 RP2.5
SD0_DATA0: J2.17 J9.7 R48.1 | length 36.9
  Top w0.254: J2.17 v1(-13.25,18.288)
  Bottom w0.254: v1(-13.25,18.288) -13.25,20.581 -10.971,22.86 -4.642,22.86 -3.118,21.336 3.754,21.336 4.399,21.981 J9.7 4.399,25.527 5.045,26.173 5.045,32.54 3.302,34.283 R48.1
SD0_DATA1: J2.18 J9.8 R47.1 | length 33
  Top w0.254: J2.18 -13.25,22.042 -11.181,24.111 4.807,24.111 5.461,24.765 v1(5.461,24.892)
  Bottom w0.254: R47.1@5.08,34.798 5.08,33.147 5.499,32.728 J9.8
SD0_DATA2: J2.16 J9.1 RP2.1 | length 27.7
  Top w0.254: J2.16 -13.75,22.184 -11.369,24.565 v1(-2.921,24.565)
  Bottom w0.254: RP2.1 -3.419,34.257 -2.391,33.229 -2.391,30.959 -2.391,28.532 -0.909,27.05 -0.909,25.974 -2.201,24.682 J9.1@-2.201,23.845 ; v1(-2.921,24.565) J9.1@-2.201,23.845 ; J9.1 J9.1@-2.201,23.845
SD0_DATA3: J2.15 J9.2 RP2.3 | length 35.5
  Top w0.254: v1(-13.75,16.002) J2.15
  Bottom w0.254: v1(-13.75,16.002) -14.704,16.956 -14.704,18.504 -14.158,19.05 -14.158,21.021 -11.411,23.768 -4.266,23.768 -2.742,22.244 -1.438,22.244 -1.101,22.581 J9.2 -1.101,24.861 -0.455,25.507 -0.455,27.238 -1.937,28.72 -1.937,33.467 -2.629,34.159 RP2.3
SD0_INS: J1.35
TDN_OUT1: J2.3 J4.27 | length 24.8
  Top w0.254: J2.3 -16.75,16.469 v1(-15.748,15.467) ; v1(-9.912,8.382) -9.023,7.493 -1.155,7.493 0.75,9.398 J4.27
  Bottom w0.254: v1(-15.748,15.467) -15.748,14.224 -10.538,9.014 ; -10.541,9.011 v1(-9.912,8.382)
TDN_OUT2: J2.6 J4.28 | length 28.9
  Top w0.254: v1(-16.256,19.177) -16.25,19.183 J2.6 ; v1(-10.668,8.382) -9.325,7.039 -0.967,7.039 1.227,9.233 1.227,10.627 J4.28
  Bottom w0.254: v1(-16.256,19.177) -16.256,13.97 v1(-10.668,8.382)
TRX_N: J7.5 R23.2 R26.2 | length 10.6
  Top w0.254: v1(-9.779,77.47) -9.281,76.972 J7.5 -9.281,68.553 R23.2 ; R23.2@-9.525,68.538 R23.2@-9.395,68.668
  Bottom w0.254: v1(-9.779,77.47) -9.779,78.302 R26.2
TRX_P: J7.4 R26.1 R29.2 | length 8
  Top w0.254: R29.2 -10.531,72.438 v1(-10.531,73.543) J7.4
  Bottom w0.254: R26.1 -11.087,74.099 v1(-10.531,73.543)
UART0_RXD: J1.34 J8.2 | length 26.8
  Top w0.254: J8.2 -17.79,73.162 -16.075,71.447 -16.075,64.825 -12.01,60.76 -10.094,60.76 v1(-9.91,60.575) ; J1.34 v1(-9.85,54.729)
  Bottom w0.254: v1(-9.91,60.575) -9.842,60.508 -9.842,54.737 v1(-9.85,54.729)
UART0_TXD: J1.36 J8.3 | length 27.9
  Top w0.254: J8.3 -18.398,74.412 -15.621,71.635 -15.621,65.014 -11.821,61.214 v1(-9.906,61.214) ; J1.36 v1(-9.35,54.364)
  Bottom w0.254: v1(-9.906,61.214) -9.35,60.658 v1(-9.35,54.364)
UART1_RXD: J1.4 R31.1 | length 7.1
  Top w0.254: v1(-17.35,52.324) J1.4
  Bottom w0.254: v1(-17.35,52.324) -15.494,54.18 -15.494,55.469 -14.605,56.358 R31.1
UART1_TXD: J1.12 R25.1 U3.4 | length 10.4
  Top w0.254: v1(-16.509,54.865) -15.746,54.865 -15.35,54.469 J1.12
  Bottom w0.254: R25.1 R25.1@-18.061,58.839 ; U3.4 -18.381,59.159 R25.1@-18.061,58.839 ; v1(-16.509,54.865) -16.509,58.165 -17.183,58.839 R25.1@-18.061,58.839
VD_CS: J1.11 J4.37 | length 70.5
  Top w0.254: v1(-15.35,49.403) J1.11 ; v1(5.75,8.798) J4.37
  Bottom w0.254: v1(-15.35,49.403) -15.951,49.403 -19.069,46.285 -19.069,12.917 -11.721,5.569 2.521,5.569 v1(5.75,8.798)
VD_D0: J2.35 J4.11 | length 10.5
  Top w0.254: v1@-9.813,15.072 -8.75,16.135 J2.35 ; v1(-7.25,9.463) J4.11
  Bottom w0.254: v1(-9.725,15.113) -9.725,14.255 -7.25,11.78 v1(-7.25,9.463)
VD_D1: J2.33 J4.12 | length 9.4
  Top w0.254: v1(-9.271,16.256) -9.25,16.277 J2.33 ; v1(-6.75,9.76) J4.12
  Bottom w0.254: v1(-9.271,16.256) -9.271,14.443 -6.75,11.922 v1(-6.75,9.76)
VD_D2: J2.40 J4.13 | length 10.8
  Top w0.254: J2.40 -7.75,18.923 v1(-7.747,18.92) ; J4.13 -6.25,11.721 -5.515,12.456 v1(-5.515,13.255)
  Bottom w0.254: v1(-7.747,18.92) -7.747,17.78 -7.204,17.237 -7.204,14.944 v1(-5.515,13.255)
VD_D3: J2.36 J4.14 | length 10.7
  Top w0.254: v1(-8.763,18.92) -8.75,18.933 J2.36 ; J4.14 v1@-5.75,11.43
  Bottom w0.254: v1(-8.763,18.92) -8.763,14.577 -5.75,11.564 v1(-5.75,11.557)
VD_D4: J2.38 J4.16 | length 11
  Top w0.254: v1(-8.25,19.177) J2.38 ; J4.16 -4.749,10.651 v1(-4.749,11.557)
  Bottom w0.254: v1(-8.25,19.177) -8.25,17.641 -7.658,17.049 -7.658,14.756 -4.749,11.847 v1(-4.749,11.557)
VD_D5: J2.37 J4.17 | length 10
  Top w0.254: v1(-8.25,16.256) J2.37 ; v1(-4.25,9.76) J4.17
  Bottom w0.254: v1(-8.25,16.256) -8.25,14.706 -5.245,11.701 -5.245,10.755 v1(-4.25,9.76)
VD_D6: J2.41 J4.18 | length 8
  Top w0.254: J2.41 -7.25,16.114 -6.757,15.621 v1(-6.75,15.621) ; J4.18 v1(-3.75,11.557)
  Bottom w0.254: v1(-6.75,15.621) -6.75,15.132 -3.75,12.132 v1(-3.75,11.557)
VD_D7: J2.39 J4.19 | length 10.7
  Top w0.254: J2.39 -7.75,15.972 -6.891,15.113 v1(-6.096,15.113) ; J4.19@-3.273,10.627 J4.19@-3.273,10.65 ; v1(-3.25,9.76) J4.19@-3.25,10.604
  Bottom w0.254: v1@-6.092,15.117 -3.25,12.274 v1(-3.25,9.76)
VD_D8: J2.44 J4.21 | length 11.4
  Top w0.254: v1@-6.778,18.92 v1(-6.75,18.948) J2.44 ; J4.21 v1(-2.25,14.448)
  Bottom w0.254: v1(-6.75,18.948) v1(-2.25,14.448)
VD_D9: J2.46 J4.22 | length 11.4
  Top w0.254: v1(-6.25,19.177) J2.46 ; J4.22 v1(-1.75,13.942)
  Bottom w0.254: v1(-6.25,19.177) -1.75,14.677 v1(-1.75,13.942)
VD_D10: J2.42 J4.23 | length 11.9
  Top w0.254: v1(-7.25,19.177) J2.42 ; J4.23 v1(-1.25,12.7)
  Bottom w0.254: v1(-7.25,19.177) -7.25,18.768 v1@-1.25,12.768
VD_D11: J2.43 J4.24 | length 9.8
  Top w0.254: v1(-6.75,16.256) J2.43 ; J4.24 v1(-0.75,11.557)
  Bottom w0.254: v1(-6.75,16.256) -5.449,16.256 v1(-0.75,11.557)
VD_HS: J2.45 J4.6 | length 11.3
  Top w0.254: J4.6 -9.75,12.072 -10.36,12.682 -10.36,13.95 -9.692,14.618 -5.949,14.618 -5.543,15.024 -5.543,15.534 -6.25,16.241 J2.45
VD_PCLK: J2.50 J4.9 | length 12.9
  Top w0.254: J4.9 -8.25,12.933 -7.474,13.709 -5.574,13.709 -4.064,15.219 -4.064,18.069 -5.225,19.23 J2.50
VD_RSTN: J1.1 J4.36 | length 72.4
  Top w0.254: v1(-17.875,49.476) J1.1 ; v1(-14.213,6.031) -12.354,4.172 1.138,4.172 5.25,8.284 J4.36
  Bottom w0.254: v1(-17.875,49.476) -20.431,46.92 -20.431,12.249 v1(-14.213,6.031) v1@-14.213,6.096
VD_SCK: J1.8 J4.35 | length 74.4
  Top w0.254: v1(-16.35,52.324) J1.8 ; v1(-13.533,6.058) -12.101,4.626 0.95,4.626 4.727,8.403 4.727,10.627 J4.35 J4.35@4.75,10.922
  Bottom w0.254: v1(-16.35,52.324) -16.35,50.325 -19.977,46.698 -19.977,12.502 v1(-13.533,6.058)
VD_SIMO: J1.10 J4.34 | length 72.6
  Top w0.254: v1(-15.85,51.816) J1.10 ; v1(-12.89,6.096) -11.874,5.08 0.762,5.08 4.25,8.568 J4.34
  Bottom w0.254: v1(-15.85,51.816) -15.85,50.183 -19.523,46.51 -19.523,12.729 v1(-12.89,6.096)
VD_SOMI: J1.13 J4.38 | length 69.3
  Top w0.254: v1(-14.85,48.895) J1.13 ; v1(6.249,9.4) v1(6.249,9.4) 6.25,10.024
  Bottom w0.254: v1(-14.85,48.895) -15.817,48.895 -18.615,46.097 -18.615,13.105 -11.533,6.023 2.333,6.023 5.71,9.4 v1(6.249,9.4)
VD_VS: J2.47 J4.7 | length 11.3
  Top w0.254: J4.7 -9.25,12.214 -9.906,12.87 -9.906,13.761 -9.504,14.164 -5.761,14.164 -5.089,14.836 -5.089,15.722 -5.75,16.383 J2.47
VOUT0_CON: D3.2 J7.2 R27.2 SAB1.2 | length 17.2
  Top w0.254: v1(-13.081,76.581) -13.081,75.168 J7.2 J7.2@-13.07,75.157
  Bottom w0.254: R27.2 -23.368,74.523 -22.427,75.464 SAB1.2 -13.07,75.464 D3.2@-13.07,77.156
ZOOM_CTRL_CLK: J2.28
ZOOM_CTRL_DIR: J2.32
ZOOM_CTRL_EN: J2.25
ZOOM_CTRL_NFAULT: J2.19
ZOOM_CTRL_NSLEEP: J2.22
pads on no net: D3.3 J1.3 J1.6 J1.19 J1.20 J1.21 J1.23 J1.25 J1.38 J1.40 J1.42 J2.5 J2.7 J2.20 J4.4 J4.29 J4.32 J7.3 SW1.5 SW1.6 U1.7
copper on no net:
  other v1: -0.635,1.905 22.86,14.576 -11.43,27.305 3.81,40.005

## Polygon pours and split planes (outlines as drawn)
GND on Bottom "Bottom-No Net" (solid, remove dead copper, pour order 2): -32.512,85.725 -33.782,84.455 -33.782,69.977 -33.782,0 -30.607,-3.175 -28.702,-5.08 31.115,-5.08 32.893,-5.08 36.068,-1.905 35.052,-0.889 35.052,82.804 35.052,84.328 34.925,84.455
GND on Top "Top_GND" (solid, remove dead copper, pour order 4): -32.639,83.693 -33.528,82.804 -33.528,0.381 -33.528,-1.27 -30.607,-4.191 -29.972,-3.556 29.21,-3.556 29.21,-2.159 32.258,0.889 34.163,2.794 34.163,82.042 34.163,83.439 31.75,85.852

## Keep-outs
Keep-Out Layer:
  the board outline again, w0.127

## Other copper
Top:
  pour cut-out: -56.287,8.157 -56.287,-6.709 -56.308,-6.731 -40.466,-6.731 -40.466,8.004 -40.433,8.036
Bottom:
  pour cut-out: 20.818,66.164 13.765,66.14 13.777,59.103 20.831,59.103

## Silkscreen, mask and mechanical layers (free items; w line width, h text height)
Solder Mask Bottom:
  region: 25.031,81.661 29.929,81.661 29.929,-0.635 25.031,-0.635
  region: -30.048,81.661 -25.07,81.661 -25.07,-0.635 -30.048,-0.635